# Altium PCB PMP20634_PCB.PcbDoc
Units mil, origin at the board's own origin, x right, y up, seen from the top; angles counter-clockwise.
Board outline 4950 x 3450 mil, 2 copper layers (Top Layer, Bottom Layer), stack 62 mil thick; 23 components, 0 nets, 11 pads, 0 vias.
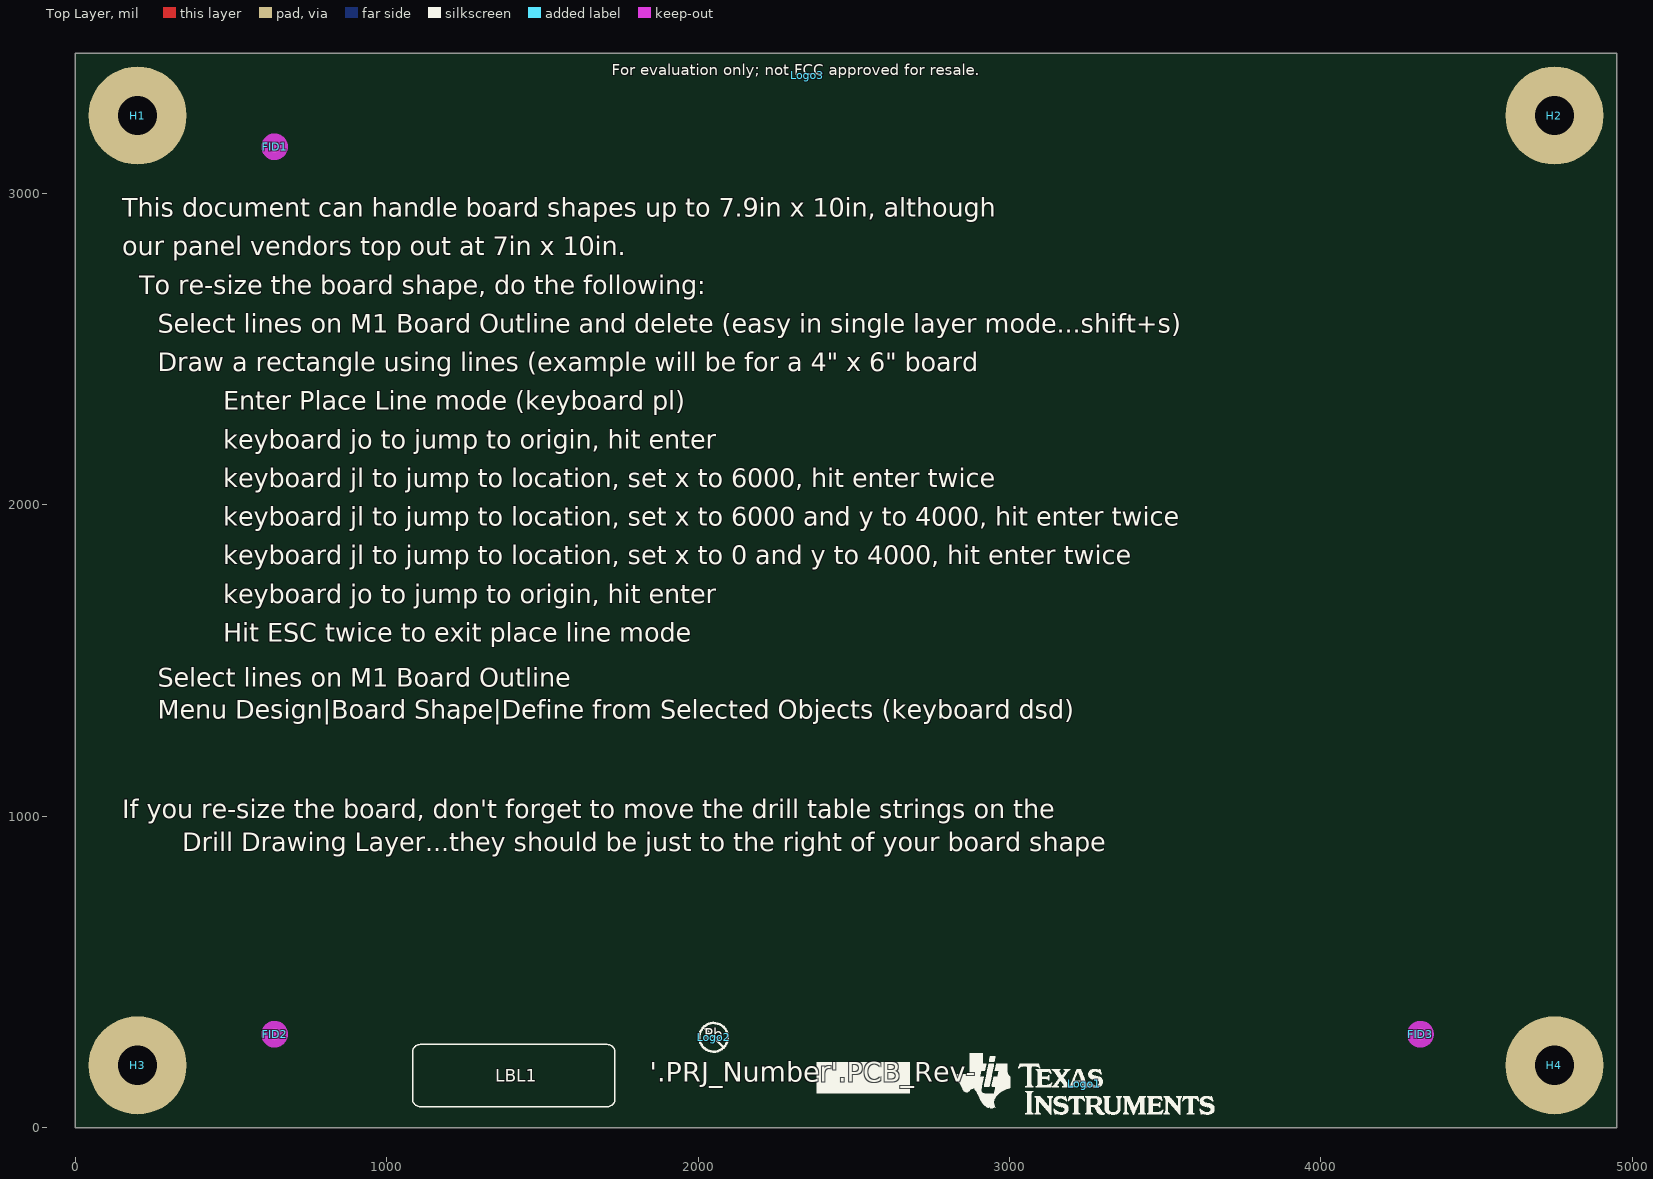
[diagram p0: Top Layer view]
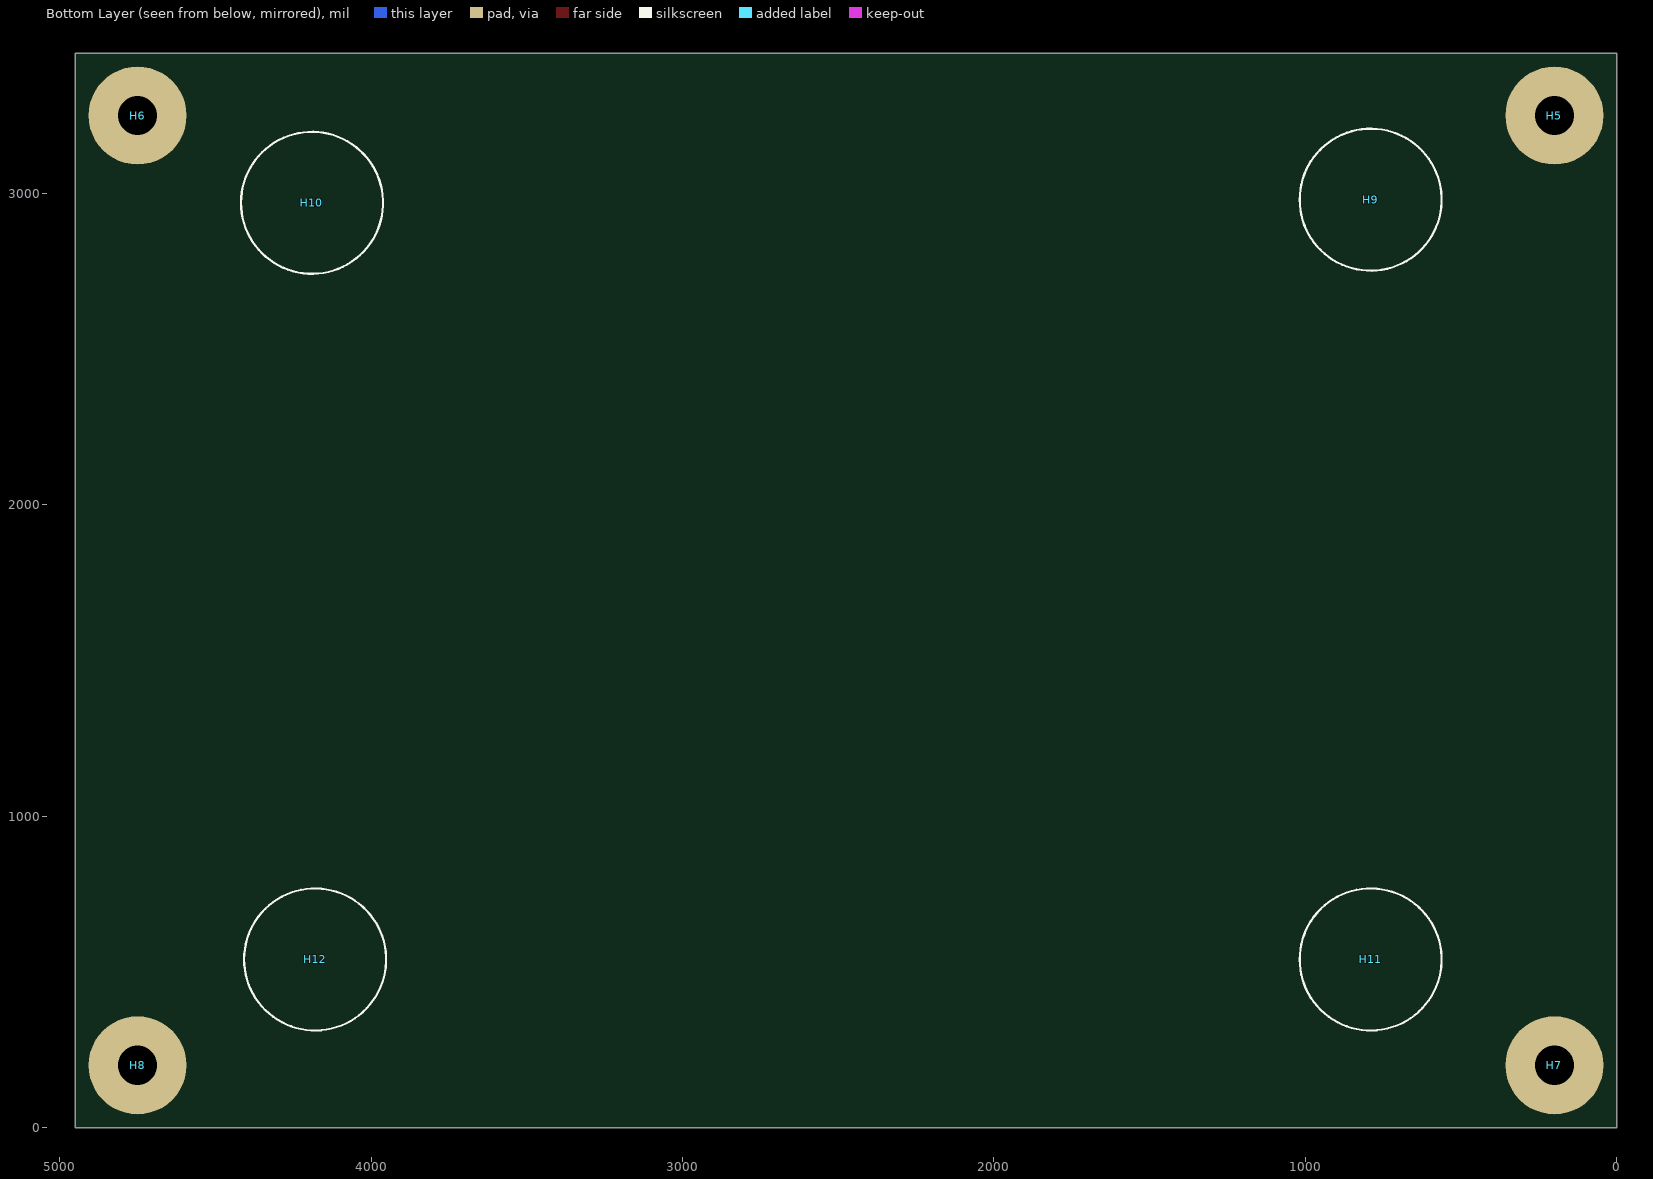
[diagram p1: Bottom Layer view, seen from below]

## Layer stack, top to bottom
Top Solder: solder mask 0.4, Solder Resist, Dk 3.5
Top Layer: signal copper 1.4
Dielectric1: core 59.2, FR-4, Dk 4.8
Bottom Layer: signal copper 1.4
Bottom Solder: solder mask 0.4, Solder Resist, Dk 3.5

## Board outline
0,0 4950,0 4950,3450 0,3450

## Design rules (kind name [scope] priority, off if disabled: settings)
AcuteAngle [All] p1: minimum=4.50000000000000E+0001 checktracksonly=FALSE
AssemblyTestPointUsage [All] p1: valid=2
BoardOutlineClearance BoardOutlineClearance_MountingHoles [OnCopper and InComponentClass('Mounting Holes')] p1: gap=40
BoardOutlineClearance BoardOutlineClearance_Poly [OnCopper and IsPoly] p2: gap=25
BoardOutlineClearance [OnCopper and Not InComponentClass('Logo') and not InComponentClass('FiducialMark') and not InRegion(1000,500,4000,800) and not InPoly] p3: gap=75
Clearance Clearance_Keepouts [((IsTrack Or IsArc) And Not InPoly) And IsFree and IsKeepOut vs ((IsTrack Or IsArc) And Not InPoly) And IsFree and IsKeepOut] p1: gap=0
Clearance Clearance_Poly [InPolygon] p2: gap=25
Clearance [All] p3: gap=7.87
ComponentClearance ComponentClearance_MountingHoles_FiducialMarks [InComponentClass('Mounting Holes') vs InComponentClass('FiducialMark')] p1: gap=50 collisioncheckmode=3 verticalgap=10 showdistances=FALSE
ComponentClearance ComponentClearance_Shunt [InComponentClass('Header') vs InComponentClass('Shunt')] p2: gap=0 collisioncheckmode=3 verticalgap=0 showdistances=FALSE
ComponentClearance ComponentClearance_Logo [InComponentClass('Logo')] p3: gap=50 collisioncheckmode=3 verticalgap=10 showdistances=FALSE
ComponentClearance ComponentClearance_ScrewToNut [(HasFootprint('NY PMS 440 0025 PH')) vs (HasFootprint('Keystone_1902C'))] p4: gap=5 collisioncheckmode=3 verticalgap=10 showdistances=FALSE
ComponentClearance ComponentClearance_MountingHoles [InComponentClass('Mounting Holes')] p5: gap=250 collisioncheckmode=3 verticalgap=100000 showdistances=FALSE
ComponentClearance ComponentClearance_SmallPassives [HasFootprint('0201*') or HasFootprint('0402*') or HasFootprint('0508') or HasFootprint('0603*') or HasFootprint('0612') or HasFootprint('0805*') or HasFootprint('0815*') or HasFootprint('0830*') or HasFootprint('1206*') or HasFootprint('1210*') or HasFootprint('1808*') or HasFootprint('1812*') or HasFootprint('1825*') or HasFootprint('2010*') or HasFootprint('2220*') or HasFootprint('2225*') or HasFootprint('2512*') or HasFootprint('2728*') or HasFootprint('3518*') vs HasFootprint('0201*') or HasFootprint('0402*') or HasFootprint('0508') or HasFootprint('0603*') or HasFootprint('0612') or HasFootprint('0805*') or HasFootprint('0815*') or HasFootprint('0830*') or HasFootprint('1206*') or HasFootprint('1210*') or HasFootprint('1808*') or HasFootprint('1812*') or HasFootprint('1825*') or HasFootprint('2010*') or HasFootprint('2220*') or HasFootprint('2225*') or HasFootprint('2512*') or HasFootprint('2728*') or HasFootprint('3518*')] p6: gap=14.96 collisioncheckmode=3 verticalgap=10 showdistances=FALSE
ComponentClearance ComponentClearance_THtoSMT [IsThruComponent vs IsSMTComponent] p7: gap=40 collisioncheckmode=3 verticalgap=30 showdistances=FALSE
ComponentClearance ComponentClearance_THtoTH [IsThruComponent vs IsThruComponent] p8: gap=30 collisioncheckmode=3 verticalgap=30 showdistances=FALSE
ComponentClearance [All] p9: gap=30 collisioncheckmode=3 verticalgap=10 showdistances=FALSE
DiffPairsRouting [All] p1: maxlimit=100 minlimit=10 mostfreqgap=10 toplayer_minwidth=15 toplayer_maxwidth=15 toplayer_prefwidth=15 bottomlayer_minwidth=15 bottomlayer_maxwidth=15 bottomlayer_prefwidth=15 maxuncoupledlength=1000
FabricationTestPointUsage TestPointUsage [All] p1: valid=2 allowmultiple=FALSE
FabricationTestpoint Testpoint [All] p1: side=3 testpointundercomponent=TRUE minsize=40 maxsize=100 preferedsize=60 minholesize=0 maxholesize=40 preferedholesize=32 testpointgrid=1 allowsidetop=TRUE allowsidebottom=TRUE usegrid=TRUE gridtolerance=0.01
FanoutControl Fanout_LCC [IsLCC] p1: bgadir=Out bgaviamode=Centered fanoutstyle=Auto fanoutdirection=Alternating viagrid=1 // Fanout_LCC (Default Rule)
FanoutControl Fanout_BGA [IsBGA] p2: bgadir=Out bgaviamode=Centered fanoutstyle=Auto fanoutdirection=Alternating viagrid=1 // Fanout_BGA (Default Rule)
FanoutControl Fanout_Default [All] p4: bgadir=Out bgaviamode=Centered fanoutstyle=Auto fanoutdirection=Alternating viagrid=1 // Fanout_Default (Default Rule)
FanoutControl Fanout_Small [(CompPinCount < 5)] p5: bgadir=Out bgaviamode=Centered fanoutstyle=Auto fanoutdirection=OutThenIn viagrid=1 // Fanout_Small (Default Rule)
HoleSize [All] p1: absolutevalues=TRUE maxlimit=251 minlimit=7.87 maxpercent=80.000 minpercent=20.000
MinimumAnnularRing MinimumAnnularRing_ThermalPadVias [IsVia and InAnyComponent] p1: minimumring=5.91
MinimumAnnularRing [All] p2: minimumring=8
MinimumSolderMaskSliver MinimumSolderMaskSliver_Logo [InComponentClass('Logo') vs InComponentClass('Logo')] p1: minsoldermaskwidth=0.7
MinimumSolderMaskSliver [All] p2: minsoldermaskwidth=3.94
PlaneConnect [All] p1: planeconnectstyle=Relief reliefexpansion=10 reliefentries=4 reliefconductorwidth=10 reliefairgap=10
PolygonConnect [All] p1: connectstyle=Relief reliefconductorwidth=10 reliefentries=4 polygonreliefangle="90 Angle" airgapwidth=10
RoutingVias ThermalPadVias [IsVia and InAnyComponent] p1: holewidth=7.87 width=19.68 viastyle="Through Hole" minholewidth=7.87 minwidth=19.68 maxholewidth=12.99 maxwidth=23.62
RoutingVias [All] p2: holewidth=16 width=34 viastyle="Through Hole" minholewidth=7.87 minwidth=26 maxholewidth=40 maxwidth=65
SilkToBoardRegionClearance [Not ((IsComment or IsDesignator) And (Hide <> 'False')) and not InRegion(1000,500,4000,800)] p1:
SilkToSilkClearance SilkToSilkClearance_Pb-FreeLogo [(HasFootprint('Pb-Free_Overlay_Medium') OR HasFootprint('Pb-Free_Overlay_Small')) vs (HasFootprint('Pb-Free_Overlay_Medium') OR HasFootprint('Pb-Free_Overlay_Small'))] p1: silktosilkclearance=0
SilkToSilkClearance [All] p2: silktosilkclearance=4
SilkToSolderMaskClearance SilkToComponentPadClearance [IsPad and InAnycomponent] p1: minsilkscreentomaskgap=5 clearancetoexposedcopper=TRUE
SilkToSolderMaskClearance "Silk to Solder Mask Opening" [All] p2: minsilkscreentomaskgap=4 clearancetoexposedcopper=FALSE
SolderMaskExpansion [All] p1: expansion=1.97
Width [All] p1: maxlimit=100 minlimit=6 preferedwidth=10 checkconnectedcopper=TRUE
15 further rules are at their usual default settings.

## Classes and differential pairs
component class Label: LBL1
component class AssemblyNote: ZZ1 ZZ2 ZZ3 ZZ4
component class FiducialMark: FID1 FID2 FID3
component class Logo: Logo1
component class "Mounting Holes": H1 H2 H3 H4

## Components (designator, comment, footprint, x,y, rotation, side; value= is the part's Value field where it differs from the comment)
FID1 "Fiducial" Fiducial10-20 640,3150 r0 top
FID2 "Fiducial" Fiducial10-20 640,300 r0 top
FID3 "Fiducial" Fiducial10-20 4320,300 r0 top
H1 "NY PMS 440 0025 PH" "NY PMS 440 0025 PH" 200,3250 r0 top locked
H2 "NY PMS 440 0025 PH" "NY PMS 440 0025 PH" 4750,3250 r0 top locked
H3 "NY PMS 440 0025 PH" "NY PMS 440 0025 PH" 200,200 r0 top locked
H4 "NY PMS 440 0025 PH" "NY PMS 440 0025 PH" 4750,200 r0 top locked
H5 "1902C" Keystone_1902C 200,3250 r180 bottom locked
H6 "1902C" Keystone_1902C 4750,3250 r180 bottom locked
H7 "1902C" Keystone_1902C 200,200 r180 bottom locked
H8 "1902C" Keystone_1902C 4750,200 r180 bottom locked
H9 "SJ-5303 (CLEAR)" Bumpon_SJ5003Transparent 790,2980 r180 bottom
H10 "SJ-5303 (CLEAR)" Bumpon_SJ5003Transparent 4190,2970 r180 bottom
H11 "SJ-5303 (CLEAR)" Bumpon_SJ5003Transparent 790,540 r180 bottom
H12 "SJ-5303 (CLEAR)" Bumpon_SJ5003Transparent 4180,540 r180 bottom
LBL1 "Size: 0.65\" x 0.20 \"" Label_650x200 1408,167 r0 top
Logo1 "Texas Instruments" TI_Stacked_Overlay_Small 3240,140 r0 top
Logo2 "Pb-Free Symbol" Pb-Free_Overlay_Small 2050,290 r0 top
Logo3 "FCC disclaimer" FCC_disclaimer 2350,3380 r0 top
ZZ1 "This Assembly Note is for PCB labels only" AssemblyNoteLabel 185,3938 r0 top
ZZ2 "These assemblies are ESD sensitive, ESD precautions shall be observed." AssemblyNote 185,3829.11 r0 top
ZZ3 "These assemblies must be clean and free from flux and all contaminants. Use of no clean flux is not acceptable." AssemblyNote 185,3740.56 r0 top
ZZ4 "These assemblies must comply with workmanship standards IPC-A-610 Class 2, unless otherwise specified." AssemblyNote 185,3652 r0 top

## Footprints (in the part's own frame and the unit in brackets; to place one, negate y for a bottom-side part, rotate by r counter-clockwise, add the part's x,y. Pads: shape width x height; smd on the part's side, far side on the other; paste and mask are expansions set on the pad)
AssemblyNote [mil] "Assembly Note"
AssemblyNoteLabel [mil] "Assembly Note for PCB Labels"
Bumpon_SJ5003Transparent [mil] "3M Hemispherical Bumpon transparent"
  round 1 on Mech4: 0(0,0)
  silkscreen extent -228,-228 228,228, body extent -219,-218 219,218, height 197
FCC_disclaimer [mil]
Fiducial10-20 [mm]
  round 1 smd mask+0.5: 1(0,0)
  Top Layer keep-out circle w1.178: c0,0 r0.5
Keystone_1902C [mil] "Hex Standoff, 4-40 threaded, nylon"
  body extent -145,-126 146,126, height 501
Label_650x200 [mil] "Thermal Transfer Label"
  silkscreen extent -325,-100 325,100, body extent -325,-100 325,100, height 1
"NY PMS 440 0025 PH" [mm] "4-40 nylon screw and mounting hole"
  round 8 hole 3.2: 1(0,0)
  body extent -3.3,-3.3 3.3,3.3, height 2.69
Pb-Free_Overlay_Small [mil]
  silkscreen extent -46,-46 46,46
TI_Stacked_Overlay_Small [mil]
  silkscreen extent -418,-98 418,98

## Part data
FID1 FID2 FID3: "Fiducial mark.  There is nothing to buy or mount."
H1 H2 H3 H4: "Machine Screw, Round, #4-40 x 1/4, Nylon, Philips panhead"
H5 H6 H7 H8: "Standoff, Hex, 0.5\"L #4-40 Nylon"
H9 H10 H11 H12: "Bumpon, Hemisphere, 0.44 X 0.20, Clear"
LBL1: library part THT-14-423-10, "Thermal Transfer Printable Labels, 0.650\" W x 0.200\" H - 10,000 per roll"
Logo1: library part TI_Logo, "Texas Instrument Corporate Signature"
Logo2: library part Pb-Free
Logo3: library part FCC_disclaimer, "FCC_disclaimer"
ZZ1: library part AssemblyNoteLabel
ZZ2 ZZ3 ZZ4: library part AssemblyNote

## Nets (pads, with @x,y where several pads share a name; then routed paths per layer and width w, separated by ;. In a path a pad name is that pad's centre, name@x,y a point inside that pad or via, vN(x,y) a via of type N, cw(c..) or ccw(c..) an arc to the next point about the centre after c; other vN are vias at no path point)
pads on no net: FID1.1 FID2.1 FID3.1 H1.1 H2.1 H3.1 H4.1 H9.0 H10.0 H11.0 H12.0

## Keep-outs
Keep-Out Layer:
  text ".Layer_Name" at 577,-858.49 h60

## Other copper
Top Layer:
  text ".Layer_Name" at 577,-858.49 h60
Bottom Layer:
  text ".Layer_Name" at 577,-858.49 h60

## Silkscreen, mask and mechanical layers (free items; w line width, h text height)
Top Overlay:
  region: 2680,210 2380,210 2380,110 2680,110
  text "This document can handle board shapes up to 7.9in x 10in, although" at 150,2925 h60
  text "our panel vendors top out at 7in x 10in." at 150,2800.94 h60
  text "To re-size the board shape, do the following:" at 205,2676.88 h60
  text "Select lines on M1 Board Outline and delete (easy in single layer mode...shift+s)" at 265,2552.82 h60
  text "Draw a rectangle using lines (example will be for a 4\" x 6\" board" at 265,2428.76 h60
  text "Enter Place Line mode (keyboard pl)" at 475,2304.71 h60
  text "keyboard jo to jump to origin, hit enter" at 475,2180.65 h60
  text "keyboard jl to jump to location, set x to 6000, hit enter twice" at 475,2056.59 h60
  text "keyboard jl to jump to location, set x to 6000 and y to 4000, hit enter twice" at 475,1932.53 h60
  text "keyboard jl to jump to location, set x to 0 and y to 4000, hit enter twice" at 475,1808.47 h60
  text "keyboard jo to jump to origin, hit enter" at 475,1684.41 h60
  text "Hit ESC twice to exit place line mode" at 475,1560.35 h60
  text "Select lines on M1 Board Outline" at 265,1416.3 h60
  text "Menu Design|Board Shape|Define from Selected Objects (keyboard dsd)" at 265,1312.24 h60
  text "If you re-size the board, don't forget to move the drill table strings on the" at 150,993 h60
  text "Drill Drawing Layer...they should be just to the right of your board shape" at 343,887 h60
  text "'.PRJ_Number'.PCB_Rev-" at 1845,125.77 h108.27
  text ".Layer_Name" at 577,-858.49 h60
Bottom Overlay:
  text ".Layer_Name" at 577,-858.49 h60
Top Paste:
  text ".Layer_Name" at 577,-858.49 h60
Bottom Paste:
  text ".Layer_Name" at 577,-858.49 h60
Top Solder:
  text ".Layer_Name" at 577,-858.49 h60
  text ".Layer_Name" at 577,-858.49 h60
Bottom Solder:
  text ".Layer_Name" at 577,-858.49 h60
Drill Guide:
  text ".Layer_Name" at 577,-858.49 h60
M1 Board Outline:
  the board outline again, w10
  text ".Layer_Name" at 577,-858.49 h60
M2 Board Dimensions:
  rectangle: 125,-400 500,-275
  rectangle: 0,-275 125,-150
  lines w7: 0,-275 1000,-275 ; 125,-400 125,-150 ; 250,-400 250,-150 ; 500,-400 500,-150 ; 750,-400 750,-150 ; 0,-400 0,-150 1000,-150 1000,-400 0,-400
  text ".Layer_Name" at 577,-858.49 h60
M3 3D STEP Top:
  text ".Layer_Name" at 577,-858.49 h60
M4 3D STEP Bottom:
  text ".Layer_Name" at 577,-858.49 h60
M5 Assembly Top:
  lines w10: -292,-930.17 6308,-930.17 ; -292,-726.83 6310,-726.83 ; -292,-523.5 -292,-1133.5 3713,-1133.5 6310,-1133.5 6310,-523.5 -291.5,-523.5 -291.5,-1133.5 1284,-1133.5 ; 2173,-1133.5 2173,-523.5 ; 3440,-726.83 3440,-523.5 ; 4280,-726.83 4280,-523.5 ; 4902,-1140 4902,-937.17
  text "COMPONENTS MARKED 'DNP' SHOULD NOT BE POPULATED." at 1153.5,-318.5 h60
  text "ASSEMBLY VARIANT:" at 1153,-434 h60
  text ".VariantName" at 2189,-434 h60
  text "PCB VIEWED FROM TOP SIDE" at -228.5,-655.67 h60
  text "BOARD #:" at 2248,-655.67 h60
  text ".PRJ_Number" at 2793.5,-655.67 h60
  text "REV:" at 3638,-655.67 h60
  text ".PCB_Rev" at 3929.5,-655.67 h60
  text "SVN REV:" at 4476,-655.67 h60
  text ".VersionControl_RevNumber" at 4982,-655.67 h60
  text "TID #:" at 2248,-859 h60
  text ".TID" at 2793.5,-859 h60
  text "PLOT NAME =" at -228.5,-1064.34 h60
  text ".plot_File_Name" at 577,-1064.34 h60
  text "GENERATED    :" at 2250,-1064.34 h60
  text ".Print_Date" at 3119.5,-1064.34 h60
  text ".Print_Time" at 3848.5,-1064.34 h60
  text "TEXAS INSTRUMENTS" at 5113,-1064.34 h60
M6 Assembly Bottom:
  lines w10: -292.5,-727.33 6309.5,-727.33 ; -290.5,-930.67 6309.5,-930.67 ; 1115.5,-1140.5 1115.5,-937.67 ; 1737.5,-727.33 1737.5,-524 ; 2577.5,-727.33 2577.5,-524 ; 3844.5,-1134 3844.5,-524 ; 4733.5,-1134 6309,-1134 6309,-524 -292.5,-524 -292.5,-1134 2304.5,-1134 6309.5,-1134 6309.5,-524
  text "COMPONENTS MARKED 'DNP' SHOULD NOT BE POPULATED." at 6102,-318 h60
  text ".VariantName" at 5058,-434 h60
  text "ASSEMBLY VARIANT:" at 6097,-434 h60
  text ".VersionControl_RevNumber" at 1035.5,-656.17 h60
  text "SVN REV:" at 1541.5,-656.17 h60
  text ".PCB_Rev" at 2088,-656.17 h60
  text "REV:" at 2379.5,-656.17 h60
  text ".PRJ_Number" at 3224,-656.17 h60
  text "BOARD #:" at 3769.5,-656.17 h60
  text "PCB VIEWED FROM BOTTOM SIDE" at 6246,-656.17 h60
  text ".TID" at 3224,-859.5 h60
  text "TID #:" at 3769.5,-859.5 h60
  text "TEXAS INSTRUMENTS" at 904.5,-1064.84 h60
  text ".Print_Time" at 2169,-1064.84 h60
  text ".Print_Date" at 2898,-1064.84 h60
  text "GENERATED    :" at 3767.5,-1064.84 h60
  text ".plot_File_Name" at 5440.5,-1064.84 h60
  text "PLOT NAME =" at 6246,-1064.84 h60
M9 Title Sheet:
  drawing of 57 lines, arcs and shapes, not listed
  text "1" at 739.84,8036.5 h70
  text "2" at 3235.5,8036.5 h70
  text "3" at 5724.84,8036.5 h70
  text "4" at 8231.51,8036.5 h70
  text "5" at 10730.5,8036.5 h70
  text "6" at 13235.5,8036.5 h70
  text "A" at -416.5,6893.5 h70
  text "A" at 14383.5,6893.5 h70
  text "B" at -416.5,4513.5 h70
  text "B" at 14383.5,4513.5 h70
  text "C" at -416.5,2138.5 h70
  text "C" at 14383.5,2138.5 h70
  text "PROJECT TITLE:" at 11343.5,277.5 h45
  text ".PRJ_Title" at 11393.5,144.17 h70
  text "DESIGNED FOR:" at 11343.5,-23.5 h45
  text ".PRJ_Customer" at 11393.5,-163.5 h70
  text "D" at -416.5,-231.5 h70
  text "D" at 14383.5,-231.5 h70
  text "FILE NAME:" at 11343.5,-323.5 h45
  text ".PCB_File_Name_No_Path" at 11393.5,-443.5 h70
  text "Texas Instruments (TI) and/or its licensors do not warrant the accuracy or completeness of this specification" at 6374,-605.34 h45
  text "ENGINEER:" at 11343.5,-613.5 h45
  text "LAYOUT BY:" at 12848.5,-613.5 h45
  text "or any information contained therein. TI and/or its licensors do not warrant that this design will meet" at 6329.01,-718 h45
  text ".PRJ_Engineer" at 11393.5,-768.49 h70
  text ".PCB_Layout" at 12899,-768.49 h70
  text "the specifications, will be suitable for your application or fit for any particular purpose, or will operate in" at 6329.01,-830.67 h45
  text ".Layer_Name" at 577,-858.49 h60
  text "ALTIUM DESIGNER VERSION:" at 12848.5,-923.5 h45
  text "an implementation. TI and/or its licensors do not warrant that the design is production worthy. You should" at 6329.01,-943.33 h45
  text "completely validate and test your design implementation to confirm the system functionality for your application." at 6374,-1056 h45
  text ".print_Scale" at 11393.5,-1056.83 h70
  text ".Application_BuildNumber" at 12899,-1056.83 h70
  text "1" at 739.84,-1263.5 h70
  text "2" at 3235.5,-1263.5 h70
  text "3" at 5724.84,-1263.5 h70
  text "4" at 8231.51,-1263.5 h70
  text "5" at 10730.5,-1263.5 h70
  text "6" at 13235.5,-1263.5 h70
M10 Fab Notes:
  drawing of 173 lines, arcs and shapes, not listed
  text "DESIGN INFORMATION" at 12378.02,6201 h60
  text "MIN. TRACK WIDTH:" at 11733.46,6021 h60
  text "8" at 12829.7,6021 h60
  text "MIL" at 12984.46,6021 h60
  text "MIN. CLEARANCE:" at 11733.46,5889 h60
  text "0.2" at 12769.7,5889 h60
  text "mm" at 12984.46,5889 h60
  text "MIN. VIA PAD SIZE:" at 11733.46,5757 h60
  text "24" at 12799.71,5757 h60
  text "MIL" at 12984.46,5757 h60
  text "0.05mm (2MIL)" at 12428.46,5615.29 h60
  text "MINIMUM ANNULAR RING" at 11404.23,5611 h60
  text "EXTERNAL" at 13136.46,5611 h60
  text "PER" at 11604.23,5493 h60
  text "IPC-D-275 CLASS 2 LEVEL C" at 11824.23,5493 h60
  text "MIL, HOLES" at 13312.46,5380.71 h60
  text "+/-" at 12920,5380 h60
  text "+/-" at 13774,5380 h60
  text "REGISTRATION TOLERANCES:" at 11404.23,5375 h60
  text "METAL" at 12604,5375 h60
  text "5" at 13180.2,5375 h60
  text "3" at 14013.2,5375 h60
  text "MIL" at 14129.46,5375 h60
  text "+/-" at 13774,5262 h60
  text "HOLE SIZE TOLERANCE (UNLESS OTHERWISE SPECIFIED):" at 11404.23,5257 h60
  text "3" at 14013.2,5257 h60
  text "MIL" at 14129.46,5257 h60
  text "MATERIAL:" at 11329.46,5047.54 h60
  text "FR-4 High Tg" at 12315.9,4907.21 h60
  text "FR-408" at 11750.46,4898.64 h60
  text "OTHER" at 13238.46,4898.64 h60
  text "X" at 12161,4895 h60
  text "62 MIL (1.6mm) +/-10%" at 12070.56,4735.92 h60
  text "THICKNESS:" at 11404.23,4731.64 h60
  text "X" at 11942.4,4731.64 h60
  text "OTHER" at 13355.46,4731.64 h60
  text "TOLERANCE:" at 11404.23,4573.64 h60
  text "X" at 12243.53,4573.64 h60
  text "ANSI IPC-6012 TYPE 3 CLASS 2" at 12430.48,4573.64 h60
  text "OTHER +/-" at 12430.46,4417.64 h60
  text "BOW & TWIST:" at 11404.23,4260.64 h60
  text "X" at 12243.53,4260.64 h60
  text "ANSI IPC-6012 TYPE 3 CLASS 2" at 12430.48,4260.64 h60
  text "OTHER +/-" at 12430.46,4102.13 h60
  text "DRILLING:" at 11329.46,3963.64 h60
  text "REFERENCE:" at 11404.23,3846.64 h60
  text "X" at 12052.46,3846.64 h60
  text "AS SHOWN" at 12239.46,3846.64 h60
  text "X" at 12953.46,3846.64 h60
  text "NC_DRILL FILES" at 13090.46,3846.64 h60
  text "PTH COPPER THICKNESS:" at 11404.23,3688.64 h60
  text "X" at 12534.46,3688.64 h60
  text "20-30 um" at 12671.46,3688.64 h60
  text "OTHER" at 13388.46,3688.64 h60
  text "BOARD FINISH:" at 11329.46,3529.64 h60
  text "SILKSCREEN:" at 11484.68,3411.64 h60
  text "X" at 12433.46,3411.64 h60
  text "TOP" at 12559.46,3411.64 h60
  text "X" at 12943.46,3411.64 h60
  text "BOTTOM" at 13070.46,3411.64 h60
  text "SILKSCREEN COLOR:" at 11484.68,3244.64 h60
  text "X" at 12432.42,3244.64 h60
  text "WHITE" at 12559.46,3244.64 h60
  text "OTHER" at 13070.46,3244.64 h60
  text "X" at 12563.42,3085.44 h60
  text "GREEN" at 12690.46,3085.44 h60
  text "OTHER" at 13308.46,3085.44 h60
  text "SOLDER RESIST COLOR:" at 11484.68,3074.64 h60
  text "X" at 12563.42,2915.44 h60
  text "MATTE" at 12690.46,2915.44 h60
  text "SEMI-GLOSS" at 13308,2914.8 h60
  text "IMMERSION GOLD (ENIG)" at 12390.46,2726.92 h60
  text "ENEPIG" at 13728,2723.64 h60
  text "SURFACE FINISH:" at 11329.46,2722.64 h60
  text "X" at 12203.51,2722.64 h60
  text "IMM. TIN/SILVER OR EQUIV" at 11659,2565.64 h60
  text "OTHER" at 13090.46,2565.64 h60
  text "ARRAY/PANEL:" at 11329.46,2386.64 h60
  text "CUT AND TRIM PER M1 BOARD OUTLINE" at 12390.46,2382.35 h60
  text "N.C. ROUTE" at 12390.46,2230.64 h60
  text "X" at 13069.46,2230.64 h60
  text "V. SCORE" at 13256.46,2230.64 h60
  text "CERTIFICATION:" at 11329.46,2093.64 h60
  text "MATERIALS AND WORKMANSHIP FOR ALL PCBS" at 12054.46,2093.64 h60
  text "TO MEET OR EXCEED THE REQUIREMENTS OF:" at 12054.46,1995.64 h60
  text "X" at 11680.96,1859.13 h60
  text "ANSI IPC-A-600F CLASS ->" at 11819.96,1859.13 h60
  text "X" at 13459.02,1859.13 h60
  text "2" at 13577.96,1859.14 h60
  text "1" at 13262.96,1857.64 h60
  text "3" at 13931.96,1857.64 h60
  text "X" at 12495.02,1699.64 h60
  text "RoHS" at 12631.96,1699.64 h60
  text "OTHER" at 13276.36,1699.64 h60
  text "PER ORDER" at 13673.42,1699.64 h60
  text "ALL BOARDS MUST MEET OR EXCEED UL94-V0 REQUIREMENTS." at 11357,1534 h60
  text "PCB MUST BEAR THE UL94V-0 UL REGISTERED MATERIAL ID NUMBER" at 11357,1414 h60
  text "ADDITIONAL REQUIREMENTS:" at 11329.46,1240.64 h60
  text "MICROSECTION:" at 11404.23,1125.64 h60
  text "YES" at 12309.96,1125.64 h60
  text "REQUIRED" at 13171.46,969.49 h60
  text "BARE BOARD ELEC. TEST:" at 11404.23,966.64 h60
  text "NONE" at 12709.96,966.64 h60
  text "X" at 13044.46,966.64 h60
  text "PER ORDER" at 13763.46,966.64 h60
  text ".Layer_Name" at 577,-858.49 h60
M11 Gerber Information:
  lines w10: -292,-930.17 6308,-930.17 ; -292,-726.83 6310,-726.83 ; -292,-523.5 -292,-1133.5 3713,-1133.5 6310,-1133.5 6310,-523.5 -291.5,-523.5 -291.5,-1133.5 1284,-1133.5 ; 2173,-1133.5 2173,-523.5 ; 3440,-726.83 3440,-523.5 ; 4280,-726.83 4280,-523.5 ; 4902,-1140 4902,-937.17
  text "ALL ARTWORK VIEWED FROM TOP SIDE" at -228.5,-655.67 h60
  text "BOARD #:" at 2248,-655.67 h60
  text ".PRJ_Number" at 2793.5,-655.67 h60
  text "REV:" at 3638,-655.67 h60
  text ".PCB_Rev" at 3929.5,-655.67 h60
  text "SVN REV:" at 4476,-655.67 h60
  text ".VersionControl_RevNumber" at 4982,-655.67 h60
  text "LAYER NAME =" at -228.5,-858.49 h60
  text "TID #:" at 2248,-859 h60
  text ".TID" at 2793.5,-859 h60
  text "PLOT NAME =" at -228.5,-1064.34 h60
  text ".plot_File_Name" at 577,-1064.34 h60
  text "GENERATED    :" at 2250,-1064.34 h60
  text ".Print_Date" at 3119.5,-1064.34 h60
  text ".Print_Time" at 3848.5,-1064.34 h60
  text "TEXAS INSTRUMENTS" at 5113,-1064.34 h60
M12 Stackup:
  drawing of 191 lines, arcs and shapes, not listed
  text "Layer" at 9790.34,7830 h60
  text "Name" at 10200.26,7830 h60
  text "Material" at 11130,7830 h60
  text "Thickness" at 11989.77,7830 h60
  text "Constant" at 12639.6,7830 h60
  text "Board Layer Stack" at 13209.46,7830 h60
  text "1" at 9790.34,7710 h60
  text "Top Overlay" at 10200.26,7710 h60
  text "2" at 9790.34,7590 h60
  text "Top Solder" at 10200.26,7590 h60
  text "Solder Resist" at 11130,7590 h60
  text "0.40mil" at 11989.77,7590 h60
  text "3.5" at 12639.6,7590 h60
  text "3" at 9790.34,7470 h60
  text "Top Layer" at 10200.26,7470 h60
  text "Copper" at 11130,7470 h60
  text "1.40mil" at 11989.77,7470 h60
  text "4" at 9790.34,7350 h60
  text "Dielectric1" at 10200.26,7350 h60
  text "FR-4" at 11130,7350 h60
  text "59.20mil" at 11989.77,7350 h60
  text "4.8" at 12639.6,7350 h60
  text "5" at 9790.34,7230 h60
  text "Bottom Layer" at 10200.26,7230 h60
  text "Copper" at 11130,7230 h60
  text "1.40mil" at 11989.77,7230 h60
  text "6" at 9790.34,7110 h60
  text "Bottom Solder" at 10200.26,7110 h60
  text "Solder Resist" at 11130,7110 h60
  text "0.40mil" at 11989.77,7110 h60
  text "3.5" at 12639.6,7110 h60
  text "7" at 9790.34,6990 h60
  text "Bottom Overlay" at 10200.26,6990 h60
  text ".Layer_Name" at 577,-858.49 h60
M13 Component Bodies Top:
  text ".Layer_Name" at 577,-858.49 h60
M14 Component Bodies Bottom:
  text ".Layer_Name" at 577,-858.49 h60
M15 Courtyards Top:
  text ".Layer_Name" at 577,-858.49 h60
M16 Courtyards Bottom:
  text ".Layer_Name" at 577,-858.49 h60
Drill Drawing:
  circle w10: c5363.82,3266.02 r27.67
  lines w12: 5286,3201 8518.19,3201 ; 5286,3325.5 8518.19,3325.5 ; 5624.01,3076.5 5624.01,3450 ; 5956.17,3076.5 5956.17,3450 ; 6592.65,3076.5 6592.65,3450 ; 6851.85,3076.5 6851.85,3450 ; 7227.09,3076.5 7227.09,3450 ; 7951.64,3076.5 7951.64,3450 ; 5286,3076.5 8518.19,3076.5 8518.19,3450 5286,3450 5286,3076.5
  text "Symbol" at 5360.7,3362.85 h72
  text "Quantity" at 5661.36,3362.85 h72
  text "Finished Hole Size" at 5993.52,3362.85 h72
  text "Plated" at 6630,3362.85 h72
  text "Hole Type" at 6889.2,3362.85 h72
  text "Drill Layer Pair" at 7264.44,3362.85 h72
  text "Hole Tolerance" at 7988.99,3362.85 h72
  text "4" at 5661.36,3238.35 h60
  text "125.98mil (3.200mm)" at 5993.52,3238.35 h60
  text "PTH" at 6630,3238.35 h60
  text "Round" at 6889.2,3238.35 h60
  text "Top Layer - Bottom Layer" at 7264.44,3238.35 h60
  text "4 Total" at 5661.36,3113.85 h60
  text ".Layer_Name" at 577,-858.49 h60
M17 Embedded Cavity:
  text ".Layer_Name" at 577,-858.49 h60
M18 Embedded Assembly:
  text ".Layer_Name" at 577,-858.49 h60
M19 Embedded Keepout:
  text ".Layer_Name" at 577,-858.49 h60

## Dimensions
0,0 to 4950,0 on M2 Board Dimensions
0,0 to 0,3450 on M2 Board Dimensions
0,-400 to 1000,-400 on M2 Board Dimensions

## Text inside footprints (layer, text, board x,y; h text height)
Logo2: Top Overlay "Pb" at 2020.4,271.1 h60
Logo3: Top Overlay "For evaluation only; not FCC approved for resale." at 1722.93,3366.1 h60
ZZ1: M5 Assembly Top "Install label in silkscreened box after final wash.  Text shall be 8 pt font.  Text shall be per the Label Table in the PDF schematic." at 230,3918 h40